# Allegro board MOTOR.brd
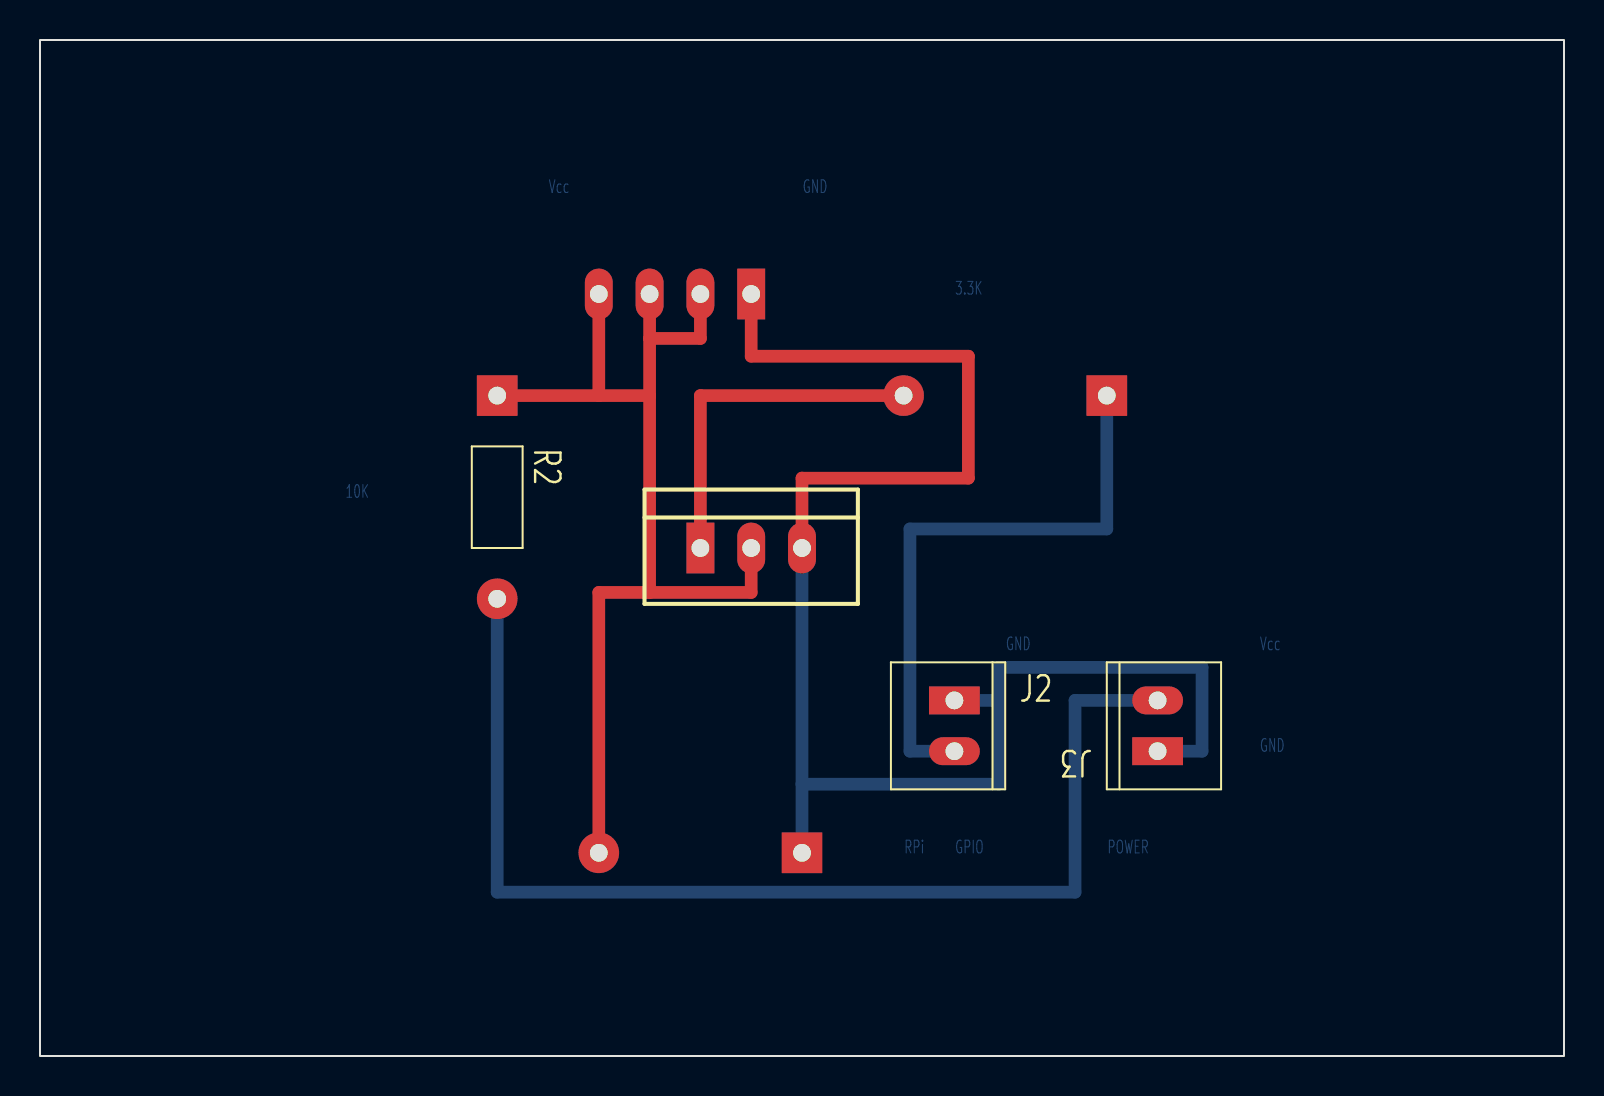
[diagram p0: board, top side]
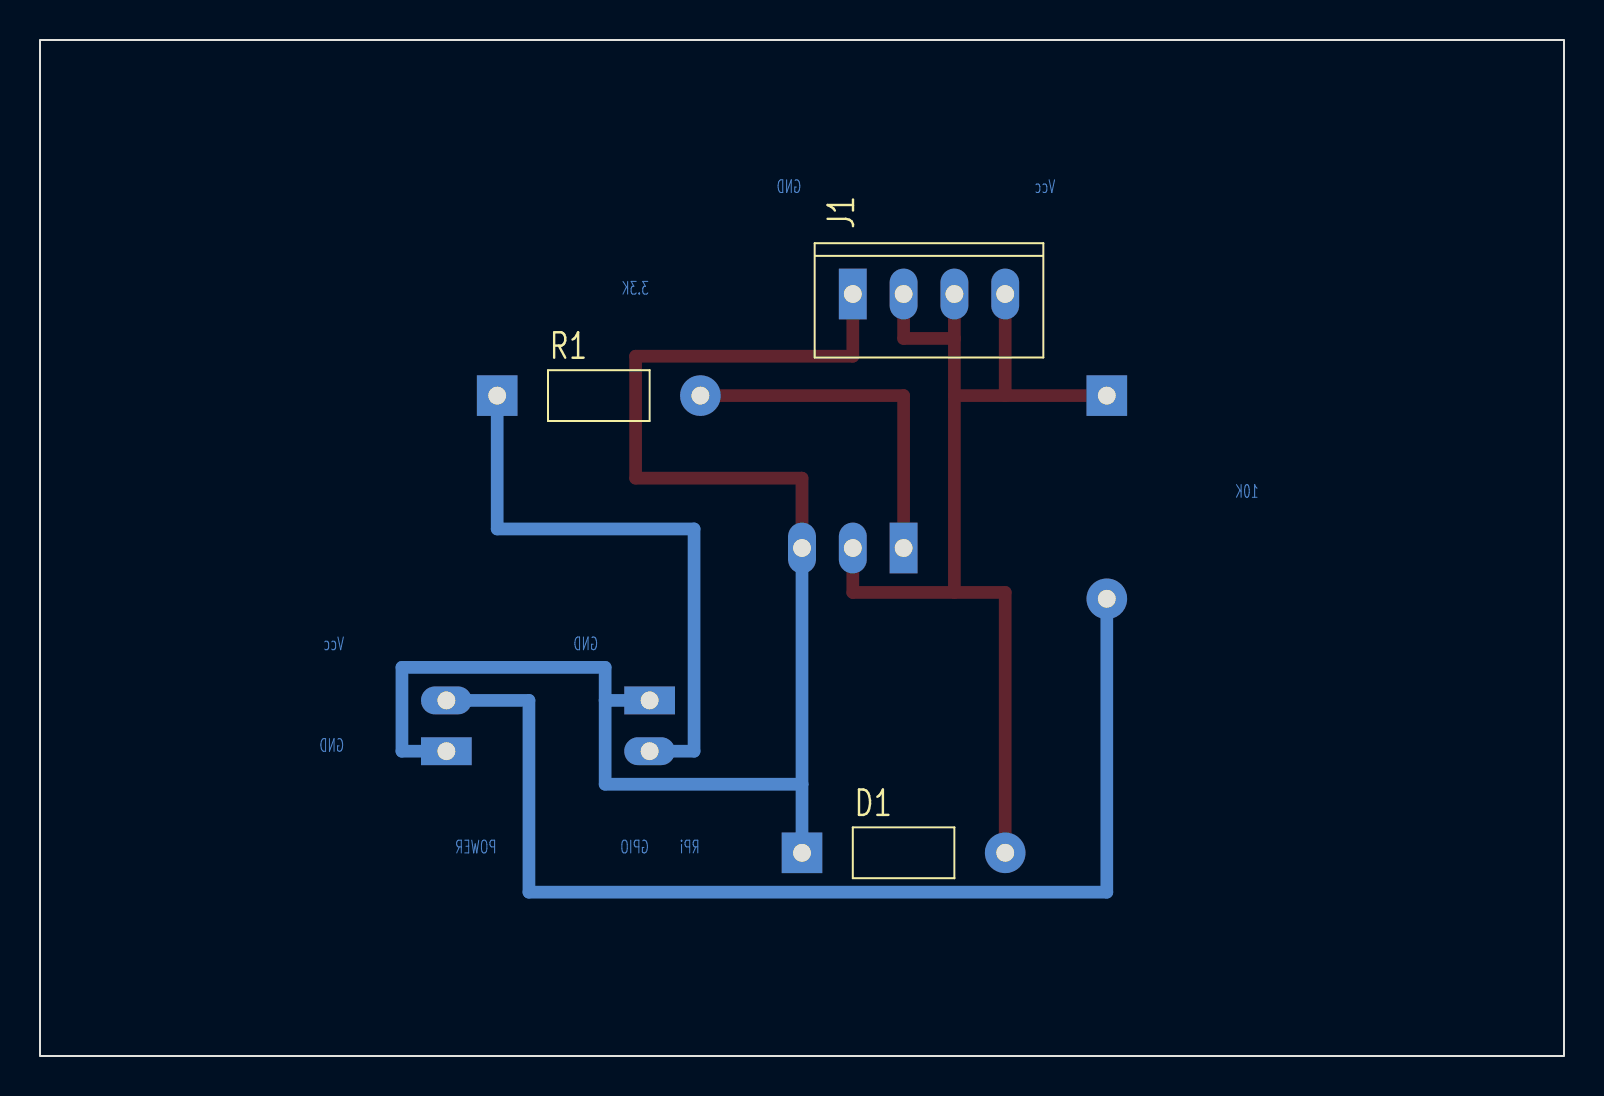
[diagram p1: board, bottom side, seen from below]

Outline 76.2 x 50.8 mm; copper layers: TOP, BOTTOM. Coordinates in mm from the lower left corner of the outline.
Outline path: rectangle 0,0 76.2,50.8

## Design rules (mm)
constraint set DEFAULT: min track width 0.635

## Placement (name value [footprint] x y rotation side)
D1  DIODE  [GU-RC400]  38.1 10.16 180 bottom
J1  4 HEADER  [GU-MOLEX4]  35.56 38.1 90 bottom
J2  HEADER 2  [GU-MOLEX2]  45.72 17.78 0 top
J3  HEADER 2  [GU-MOLEX2]  55.88 15.24 180 top
Q1  TIPL751  [GU-TO220AB]  33.02 25.4 0 top
R1  RESISTOR  [GU-RC400]  53.34 33.02 180 bottom
R2  RESISTOR  [GU-RC400]  22.86 33.02 270 top

## Library data of the parts
D1 = DIODE
J1 = 4 HEADER
J2 J3 = HEADER 2
Q1 = TIPL751
R1 R2 = RESISTOR

## Footprints (pads in the part's own frame, mm; a bottom-side part is the same pattern mirrored in y, then rotated)
GU-MOLEX2
  rect 2.54x1.397 hole 0.889: 1(0,0)
  oval 2.54x1.397 hole 0.889: 2(0,-2.54)
GU-MOLEX4
  rect 2.54x1.397 hole 0.889: 1(0,0)
  oval 2.54x1.397 hole 0.889: 2(0,-2.54) 3(0,-5.08) 4(0,-7.62)
GU-RC400
  rect 2.032x2.032 hole 0.889: 1(0,0)
  round 2.032 hole 0.889: 2(10.16,0)
GU-TO220AB
  rect 1.397x2.54 hole 0.889: 1(0,0)
  oval 1.397x2.54 hole 0.889: 2(2.54,0) 3(5.08,0)

## Nets
0: D1.1 J1.1 J2.1 J3.1 Q1.3(E)
N00253: J3.2 R2.2
N00260: D1.2(K) J1.2 J1.3 J1.4 Q1.2 R2.1
N00274: J2.2 R1.1
N00446: Q1.1 R1.2

## Routing (per net, layer and track width the routed paths; a pad name or vN(x,y) marks a point on that pad's centre or on a via; arc(x,y) is an arc through that point)
0: length 81.6
  TOP w0.635: J1.1 35.56,34.99 46.42,34.99 46.42,28.89 38.1,28.89 Q1.3
  BOTTOM w0.635: 38.1,13.59 47.94,13.59 47.94,17.78 ; 38.1,13.59 Q1.3 ; 38.1,13.59 D1.1 ; J3.1 58.1,15.24 58.1,19.43 47.94,19.43 47.94,17.78 ; J2.1 47.94,17.78
N00253: length 57.3
  BOTTOM w0.635: R2.2 22.86,8.19 51.75,8.19 51.75,17.78 J3.2
N00260: length 55.2
  TOP w0.635: Q1.2 35.56,23.18 30.48,23.18 ; 27.94,33.02 30.48,33.02 ; 27.94,33.02 R2.1 ; 27.94,33.02 J1.4 ; 30.48,33.02 30.48,35.88 ; 30.48,33.02 30.48,23.18 ; 30.48,35.88 33.02,35.88 J1.2 ; 30.48,35.88 J1.3 ; D1.2 27.94,23.18 30.48,23.18
N00274: length 29.8
  BOTTOM w0.635: J2.2 43.5,15.24 43.5,26.35 53.34,26.35 R1.1
N00446: length 17.8
  TOP w0.635: R1.2 33.02,33.02 Q1.1

## Text on the board
BOTTOM: 10K | Vcc | GND | RPi | 3.3K | GPIO | POWER
